# Altium PCB version1.PcbDoc
Units mil, origin at the board's own origin, x right, y up, seen from the top; angles counter-clockwise.
Board outline 5170 x 3190 mil, 2 copper layers (Top Layer, Bottom Layer); 39 components, 25 nets, 92 pads, 0 vias.
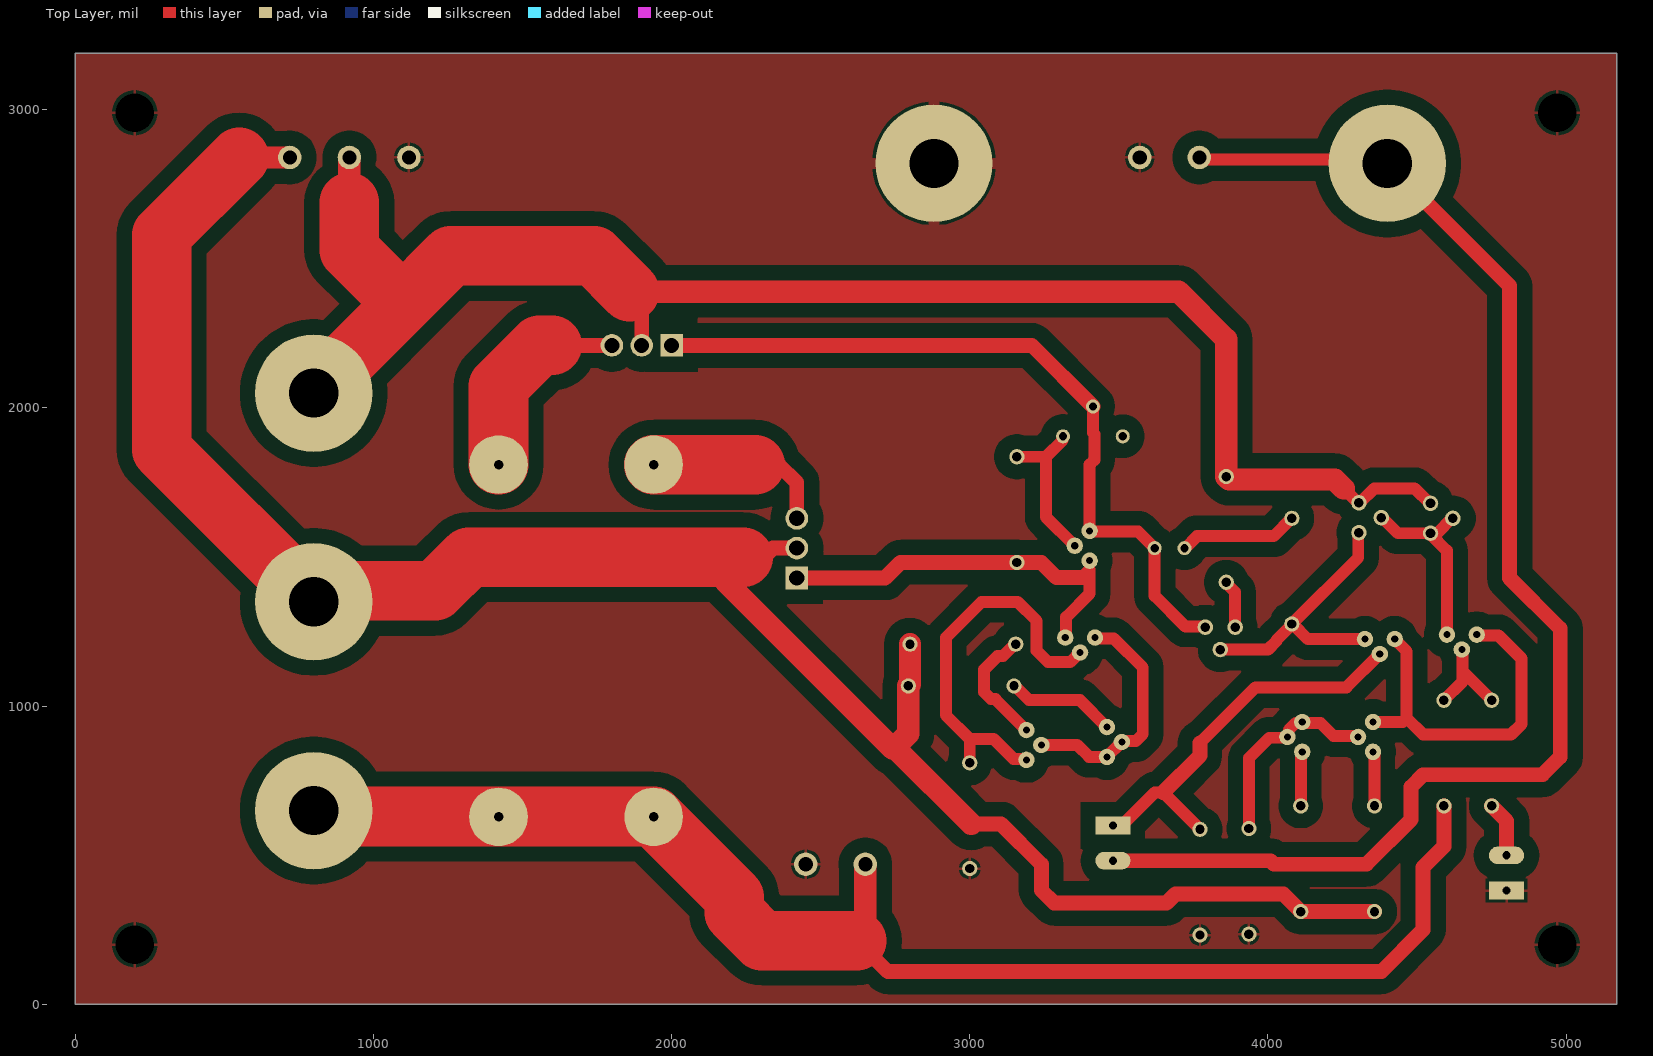
[diagram p0: Top Layer view]
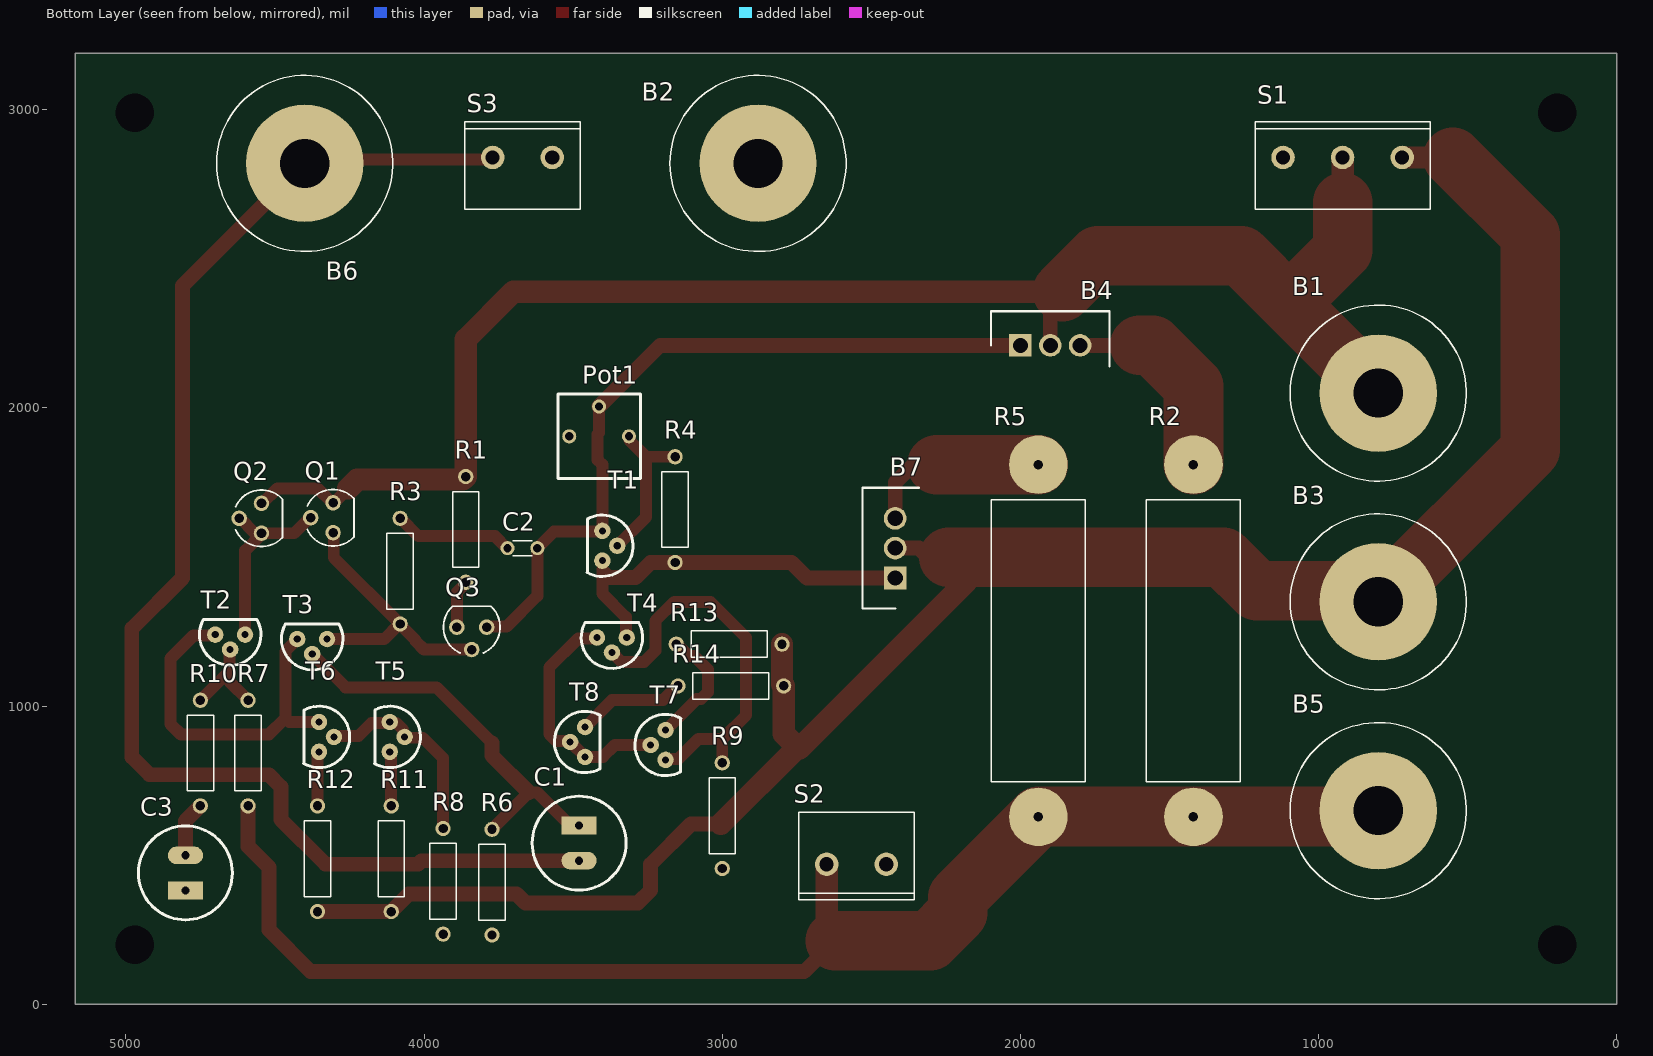
[diagram p1: Bottom Layer view, seen from below]
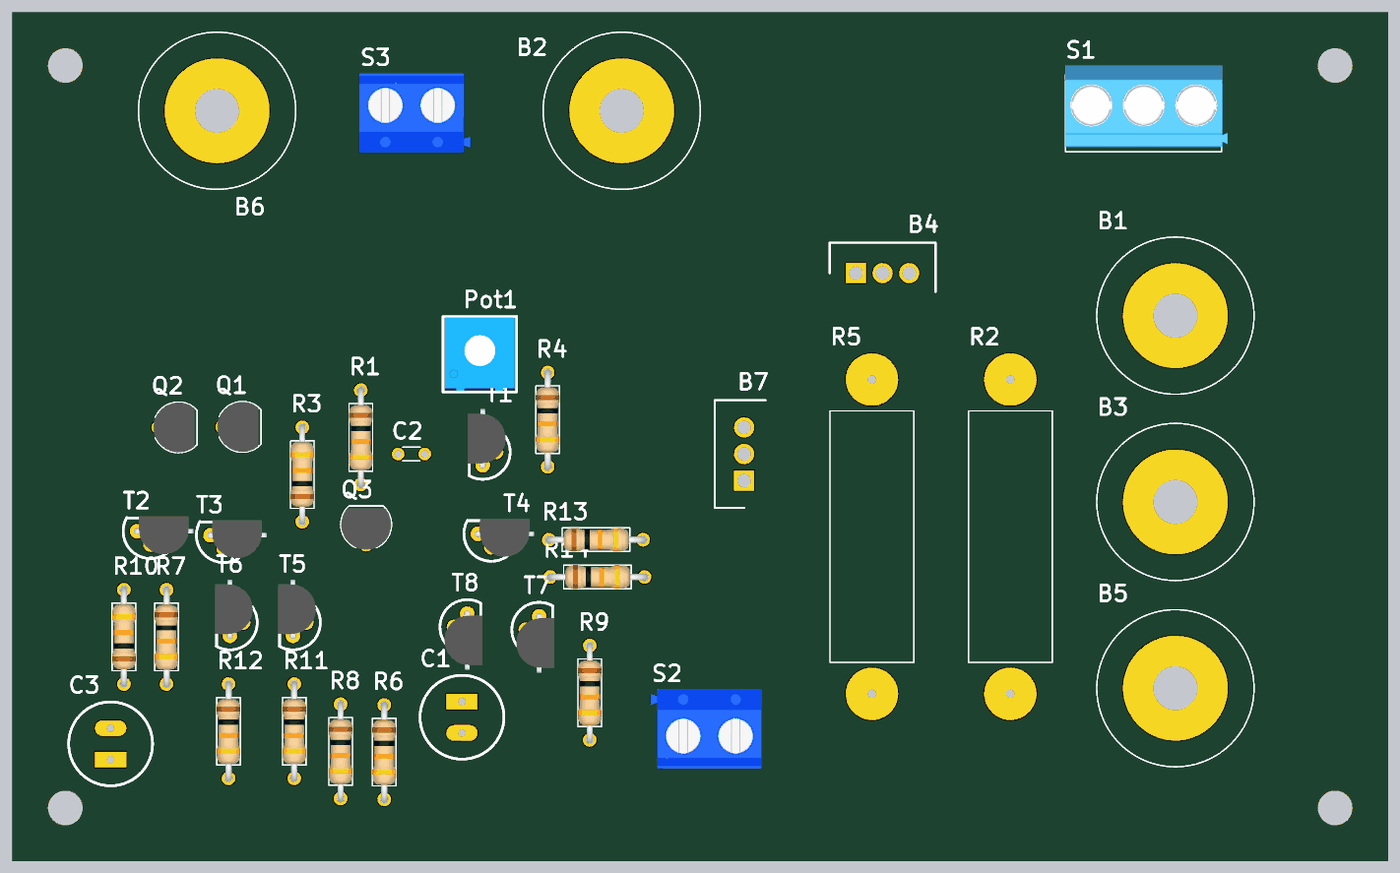
[diagram p2: 3D render of the assembled board from below, using the file's embedded part models]

## Layer stack, top to bottom
Top Solder: solder mask 0.4, Solder Resist, Dk 3.5
Top Layer: signal copper 1.4
Dielectric 1: dielectric 12.6, FR-4, Dk 4.8
Bottom Layer: signal copper 1.4
Bottom Solder: solder mask 0.4, Solder Resist, Dk 3.5

## Board outline
0,0 5170,0 5170,3190 0,3190

## Design rules (kind name [scope] priority, off if disabled: settings)
Clearance [All] p1: gap=10 ignorepadtopadclearanceinfootprint=FALSE except(0: Arc-Hole Track-Hole SMDPad-Hole THPad-Hole Via-Hole Fill-Hole Poly-Hole Region-Hole Text-Hole; 20: Arc-THPad Track-THPad; 30: Arc-Arc Arc-Track Track-Track; 50: Arc-SMDPad Arc-Via Arc-Fill Arc-Poly Arc-Region Track-SMDPad Track-Via Track-Fill Track-Poly Track-Region THPad-Fill THPad-Poly THPad-Region)
PolygonConnect [All] p1: connectstyle=Relief reliefconductorwidth=10 reliefentries=4 polygonreliefangle="90 Angle" airgapwidth=10
RoomDefinition class_ab [InComponentClass('class_ab')] p1: confinementstyle=ConfineIn formatcopy=TRUE lockcomponents=FALSE outline 0,0 5170,0 5170,3190 0,3190
RoutingVias [All] p1: holewidth=28 width=50 viastyle="Through Hole" minholewidth=28 minwidth=50 maxholewidth=28 maxwidth=50
SolderMaskExpansion [All] p1: expansion=4 istentingtop=FALSE
Width [All] p1: maxlimit=200 minlimit=10 preferedwidth=50 toplayer_minwidth=40 bottomlayer_maxwidth=10 bottomlayer_prefwidth=10 minimp=50.000000 maximp=50.000000 favimp=50.000000
30 further rules are at their usual default settings.

## Components (designator, comment, footprint, x,y, rotation, side; value= is the part's Value field where it differs from the comment)
B1 "Banana Plug" "Banana Plug On top" 800,2050 r180 bottom
B2 "Banana Plug" "Banana Plug On top" 2880,2820 r180 bottom
B3 "Banana Plug" "Banana Plug On top" 800,1350 r180 bottom
B4 "BDX33C" TO254P470X990X1900-3P 2000,2210 r180 bottom
B5 "Banana Plug" "Banana Plug On top" 800,650 r180 bottom
B6 "Banana Plug" "Banana Plug On top" 4400,2820 r270 bottom
B7 "BDX34CG" TO254P482X997X2018-3P 2420,1430 r90 bottom
C1 "Cap" "Cap Ø8" 3480,600 r270 bottom
C2 "Cap" Cap-0 3720,1530 r180 bottom
C3 "Cap" "Cap Ø8" 4800,381.89 r90 bottom
Pot1 "Pot Trim Long" "Pot Trim 3362p" 3513,1905 r180 bottom
Q1 "BC557" SOT54A 4305,1632 r90 bottom
Q2 "BC557" SOT54A 4545,1630 r90 bottom
Q3 "BC557" SOT54A 3840,1265 r0 bottom
R1 "Resistor" "RES THT 9mm" 3860,1415.67 r90 bottom
R2 "Resistor" "RES THT 30mm" 1420,628.9 r90 bottom
R3 "Resistor" "RES THT 9mm" 4080,1630 r270 bottom
R4 "Resistor" "RES THT 9mm" 3158,1482 r90 bottom
R5 "Resistor" "RES THT 30mm" 1940,1810 r270 bottom
R6 "Resistor" "RES THT 9mm" 3772,232.67 r90 bottom
R7 "Resistor" "RES THT 9mm" 4590,665.72 r90 bottom
R8 "Resistor" "RES THT 9mm" 3936,235.67 r90 bottom
R9 "Resistor" "RES THT 9mm" 3000,455.67 r90 bottom
R10 "Resistor" "RES THT 9mm" 4750,1020.05 r270 bottom
R11 "Resistor" "RES THT 9mm" 4110,311.39 r90 bottom
R12 "Resistor" "RES THT 9mm" 4357,311.39 r90 bottom
R13 "Resistor" "RES THT 9mm" 2799.67,1208 r0 bottom
R14 "Resistor" "RES THT 9mm" 2794,1068 r0 bottom
S1 "Screw 3" Screw-3 720,2840 r0 bottom
S2 "Screw 2" Screw-2 2649.8,470 r180 bottom
S3 "Screw 2" Screw-2 3570,2840 r0 bottom
T1 "BC547" TO92 3402,1588 r270 bottom
T2 "BC547" TO92 4600,1240 r0 bottom
T3 "BC547" TO92 4325,1225 r0 bottom
T4 "BC547" TO92 3320,1230 r0 bottom
T5 "BC547" TO92 4115,947 r270 bottom
T6 "BC547" TO92 4352,947 r270 bottom
T7 "BC547" TO92 3190,820 r90 bottom
T8 "BC547" TO92 3460,830 r90 bottom

## Footprints (in the part's own frame and the unit in brackets; to place one, negate y for a bottom-side part, rotate by r counter-clockwise, add the part's x,y. Pads: shape width x height; smd on the part's side, far side on the other; paste and mask are expansions set on the pad)
"Banana Plug On top" [mm] "Banana Plug"
  round 10 hole 4.2: 1(0,0)
  silkscreen extent -7.5,-7.5 7.5,7.5
"Cap Ø8" [mm] "Capacitor"
  rect 1.5x3 hole 0.7: 1(0,0)
  oval 1.5x3 hole 0.7: 2(3,0)
  silkscreen extent -2.5,-4 5.5,4
Cap-0 [mm] "Capacitor with no space"
  round 1.2 hole 0.7: 1(0,0) 2(2.54,0)
  silkscreen extent 0.45,-0.65 2.1,0.65
"Pot Trim 3362p" [mm] "Potentiometer or Trim"
  round 1.2 hole 0.7: 1(0,0) 2(5.08,0) 3(2.54,2.54)
  silkscreen extent -0.97,-3.6 6.05,3.6, body extent -0.76,-3.49 5.84,3.49, height 4.88
"RES THT 9mm" [mm]
  round 1.3 hole 0.8: 1(0,0) 2(9,0)
  silkscreen extent 1.28,-1.12 7.73,1.12, body extent -0.32,-1.13 9.28,1.13, height 2.36
"RES THT 30mm" [mm] "Typically power resistor"
  round 5 hole 0.8: 1(0,0) 2(30,0)
  silkscreen extent 3,-4 27,4
Screw-2 [mm] "Screw Terminal with 2 connections"
  round 2 hole 1.2: 1(0,0) 2(5.075,0)
  silkscreen extent -2.37,-3.03 7.45,4.43, body extent -3.07,-3.1 7.53,4.5, height 10
Screw-3 [mm] "Screw Terminal with 3 connections"
  round 2 hole 1.2: 1(0,0) 2(5.075,0) 3(10.15,0)
  silkscreen extent -2.37,-3.03 12.52,4.43, body extent -2.95,-3.8 12.55,4, height 10.3
SOT54A [mil]
  round 52 hole 32: B(0,75) C(-50,0) E(50,0)
  silkscreen extent -95,-70 95,87, body extent -94,-60 94,94, height 305
TO92 [mil]
  round 55 hole 24: 1(0,0) 2(50,50) 3(100,0)
  silkscreen extent -53,-51 153,103, body extent -111,-56 111,86, height 345
TO254P470X990X1900-3P [mm]
  rect 1.92x1.92 / inner round 1.92 / far side rect 1.92x1.92 hole 1.28: 1(0,0)
  round 1.92 hole 1.28: 2(2.54,0) 3(5.08,0)
  silkscreen extent -2.51,-1.8 7.59,2.9
TO254P482X997X2018-3P [mm]
  rect 1.935x1.935 / inner round 1.935 / far side rect 1.935x1.935 hole 1.29: 1(0,0)
  round 1.935 hole 1.29: 2(2.54,0) 3(5.08,0)
  silkscreen extent -2.6,-2.03 7.68,2.79

## Part data
B4: "TRANS NPN DARL 100V 10A TO220", Manufacturer_Name=onsemi, Mouser Part Number=512-BDX33C, Datasheet Link=https://componentsearchengine.com/Datasheets/1/BDX33C.stp, Geometry.Height=4.7mm, Manufacturer_Part_Number=BDX33C, Mouser Price/Stock=https://www.mouser.co.uk/ProductDetail/onsemi-Fairchild/BDX33C?qs=ljbEvF4DwOOIABhoL0PfhQ%3D%3D
B7: "ON Semi BDX34CG PNP Darlington Transistor, 10 A 100 V HFE:750, 3-Pin TO-220AB", Manufacturer_Name=onsemi, Mouser Part Number=863-BDX34CG, Arrow Part Number=BDX34CG, Arrow Price/Stock=https://www.arrow.com/en/products/bdx34cg/on-semiconductor, Datasheet Link=https://pdf1.alldatasheet.com/datasheet-pdf/view/172155/ONSEMI/BDX34CG.html, Geometry.Height=4.82mm, Manufacturer_Part_Number=BDX34CG, Mouser Price/Stock=https://www.mouser.co.uk/ProductDetail/onsemi/BDX34CG?qs=vNc2DXHODiJTwryTVcpUCw%3D%3D
C1 C3: library part "Capacitor unpolarized", Capacity=100uF
C2: library part "Capacitor 0 space", Capacity=220p
Pot1: "Potentiometer", Resistance=10k
Q1 Q2 Q3: "Bipolar (BJT) Transistor PNP 45 V 100 mA 320MHz 625 mW Through Hole TO-92 (TO-226)", Package="E-PKG AXIAL-LEADED-2 ON Semiconductor", Availability="In Stock", Check_prices=https://www.snapeda.com/parts/BC557/Onsemi/view-part/?ref=eda, MF=ON, MP=BC557, Price=None, SnapEDA_Link=https://www.snapeda.com/parts/BC557/Onsemi/view-part/?ref=snap
T1 T2 T3 T4 T5 T6 T7 T8: "Trans GP BJT NPN 45V 0.1A 500mW 3-Pin TO-92 T/R", Package=None, Check_prices=https://www.snapeda.com/parts/BC547/Onsemi/view-part/?ref=eda, MF="ON Semiconductor", MP=BC547, SnapEDA_Link=https://www.snapeda.com/parts/BC547/Onsemi/view-part/?ref=snap
R1: Ohm=50
R2 R5: Ohm=0.4
R3: Ohm=150
R4: Ohm=1k
R6: Ohm=4k
R7: Ohm=2k
R8: Ohm=10k
R9: Ohm=3k
R10: Ohm=165
R11 R12: Ohm=5k
R13 R14: Ohm=200

## Free pads (board coordinates)
  round 60 hole 129.92: 3(200,200) 3(200,2990) 3(4970,200) 3(4970,2990)

## Nets (pads, with @x,y where several pads share a name; then routed paths per layer and width w, separated by ;. In a path a pad name is that pad's centre, name@x,y a point inside that pad or via, vN(x,y) a via of type N, cw(c..) or ccw(c..) an arc to the next point about the centre after c; other vN are vias at no path point)
AB_in: B6.1 C1.2 S3.2 | length 4587.2
  Top Layer w40: S3.2 3777.22,2832.59 4387.41,2832.59 B6.1
  Top Layer w50: C1.2 4008.11,481.89 4020,470 4330,470 4480,620 4480,730 4520,770 4920,770 4980,830 4980,1260 4810,1430 4810,2410 B6.1
AB_out: B5.1 R2.1 R5.2 R7.1 S2.1 | length 4744.1
  Top Layer w50: 2621.29,213.97 2725.26,110 4380,110 4520,250 4520,460 4590,530 R7.1
  Top Layer w75: 2621.29,213.97 2649.8,242.48 S2.1
  Top Layer w200: B5.1 820,630 R5.2@1940,630 ; R5.2 2209.9,359 2209.9,307.16 2303.09,213.97 2621.29,213.97
DIFF_fb: R7.2 R10.1 T2.2 | length 334.5
  Top Layer w40: R7.2 4652.87,1082.92 4652.87,1117.18 ; T2.2 4652.87,1187.13 4652.87,1117.18 ; R10.1 4652.87,1117.18
DIFF_in: C1.1 R6.2 T3.2 | length 1333
  Top Layer w40: C1.1 3509.53,600 3620.21,710.68 3648.32,710.68 R6.2 ; 3772,877 3958,1063 4263,1063 T3.2
  Top Layer w50: 3648.21,710.79 3771.77,834.36 3771.77,876.77 3772,877
GND: B2.1 C3.1 pad.3 R6.1 R8.1 R9.1 S1.3 S2.2 S3.1
NetB4_3: B4.3 R2.2 | length 699.7
  Top Layer w50: 1600,2210 B4.3
  Top Layer w200: R2.2 1420,2072.84 1557.16,2210 1600,2210
NetB7_3: B7.3 R5.1 | length 624.9
  Top Layer w50: 2280,1810 2360,1810 2420,1750 B7.3
  Top Layer w200: R5.1 2280,1810
NetC2_1: C2.1 R3.1 | length 401.4
  Top Layer w40: C2.1 3721.96,1530 3761.96,1570 4018.96,1570 4078.96,1630 R3.1
NetC3_2: C3.2 R10.2 | length 186.4
  Top Layer w50: R10.2 4750,665.4 4800,615.4 C3.2
NetPot1_2: Pot1.2 R4.2 T1.2 | length 528.4
  Top Layer w40: R4.2 3158.23,1836.56 3255.75,1836.56 ; Pot1.2 3311.61,1903.61 3311.61,1892.42 3255.75,1836.56 ; T1.2 3255.75,1634.25 3255.75,1836.56
NetQ1_B: Q1.B Q2.B Q2.C T2.1 | length 620
  Top Layer w40: Q1.B 4383.25,1632 4435.25,1580 Q2.C 4545,1576.75 4600,1521.75 T2.1 ; Q2.C@4569.05,1582.3 4616.75,1630 Q2.B
NetQ3_E: Q3.E R1.1 | length 163.1
  Top Layer w40: R1.1 3860,1412.64 3890,1382.64 Q3.E
NetR8_2: R8.2 T5.1 T5.2 T6.2 | length 658
  Top Layer w40: R8.2 3936,826 4004.13,894.13 4062.13,894.13 T5.2 ; T5.2@4070,920.7 4093.43,944.13 4112.13,944.13 T5.1 4117.87,944.13 4175.87,944.13 4220.13,899.87 4299.13,899.87 T6.2
NetR9_2: R9.2 T4.2 T7.1 | length 1327.8
  Top Layer w40: R9.2 3000,890 ; T7.1 3187.13,822.87 3147.13,822.87 3080,890 3000,890 ; T4.2 3368.99,1180 3336.5,1147.5 3262.5,1147.5 3224,1186 3224,1286 3160,1350 3040,1350 2920,1230 2920,970 3000,890
NetR11_2: R11.2 T5.3 | length 183.4
  Top Layer w40: R11.2 4110,837.94 4115,842.94 T5.3
NetR12_2: R12.2 T6.3 | length 183.4
  Top Layer w40: T6.3 4352,842.94 4357,837.94 R12.2
NetR13_2: R13.2 T7.3 | length 411.6
  Top Layer w40: R13.2 3150.97,1208 3110.97,1168 3093,1168 3048,1123 3048,1047.43 3071.43,1024 3086,1024 T7.3
NetR14_2: R14.2 T8.3 | length 368.8
  Top Layer w40: R14.2 3151.36,1068 3198.99,1020.37 3369.63,1020.37 T8.3
NetT2_3: T2.3 T3.3 T6.1 | length 1225.4
  Top Layer w40: T6.1 4452,947 4465,960 ; T3.3 4425,1223.99 4465,1183.99 4465,960 ; T2.3 4702.87,1237.13 4772.87,1237.13 4850,1160 4850,940 4815,905 4520,905 4465,960
NetT4_3: T4.3 T7.2 T8.1 T8.2 | length 813.3
  Top Layer w40: T7.2 3360,870 3400,830 T8.1 T8.2 3512.87,882.87 3556.57,882.87 3580,906.3 3580,1130 3482.87,1227.13 3422.87,1227.13 T4.3
OPS_npn_b: B4.1 C2.2 Pot1.3 Q3.C T1.1 | length 2539.1
  Top Layer w40: Pot1.3 3413,1917.02 3418,1912.02 3418,1826 3402,1810 T1.1 3404.87,1585.13 3564.87,1585.13 C2.2 3620,1370 3722.7,1267.3 3787.7,1267.3 Q3.C
  Top Layer w50: B4.1 3208,2210 Pot1.3
OPS_pnp_b: B7.1 R4.1 T1.3 T4.1 | length 1299.2
  Top Layer w40: T4.1 3322.87,1232.87 3322.87,1298.87 3402,1378 3402,1459 3374,1431
  Top Layer w50: B7.1 2716,1430 2768,1482 R4.1 3158.23,1481.77 3240.23,1481.77 3291,1431 3374,1431
VAS_in: Q1.C Q3.B R3.2 T3.1 | length 944.3
  Top Layer w40: Q3.B 4000,1190 4028.28,1218.28 4028.28,1220.93 4080,1272.64 R3.2 ; Q1.C 4302.7,1579.7 4302.7,1498.37 R3.2 ; T3.1 4133.69,1225 4083.03,1275.67 R3.2
VCC: B1.1 B4.2 Q1.E Q2.E R1.2 S1.2 | length 5350.7
  Top Layer w40: 4253.75,1730 4301.75,1682 Q1.E 4308.25,1682 4356.25,1730 4491.75,1730 4541.75,1680 Q2.E
  Top Layer w50: 1860,2390 1900,2350 B4.2
  Top Layer w75: 919.09,2689.09 919.09,2839.28 S1.2 ; 1860,2390 3700,2390 3860,2230 R1.2 3870,1760 4223.75,1760 4253.75,1730
  Top Layer w200: B1.1 1099.49,2349.49 ; 919.09,2689.09 919.09,2529.89 1099.49,2349.49 ; 1860,2390 1740,2510 1260,2510 1099.49,2349.49
VDD: B3.1 B7.2 R11.1 R12.1 R13.1 R14.1 S1.1 | length 6827.6
  Top Layer w50: 2240,1500 2310,1500 2340,1530 B7.2@2417.62,1530 ; 3005,605 3105,605 3240,470 3240,383 3283,340 3660,340 3690,370 4051.39,370 R11.1 R12.1
  Top Layer w75: 550,2840 S1.1 ; 2180,1500 2180,1420 2743,857 ; R13.1 2799.67,1073.67 R14.1 2794,908 2748,862 3005,605
  Top Layer w200: 550,2840 290,2580 290,1860 B3.1 837.06,1387.06 1207.06,1387.06 1320,1500 2240,1500
pads on no net: Pot1.1

## Polygon pours and split planes (outlines as drawn)
GND on Top Layer "GND_L01_P000" (solid, pour order 0): 0,0 0,3190 5170,3190 5170,0